# Altium PCB Hat_PCB.PcbDoc (part 1 of 2)
Units mm, origin at the board's own origin, x right, y up, seen from the top; angles counter-clockwise.
Board outline 64 x 85 mm, 4 copper layers (Top Layer, Ground Plane, Power Plane, Bottom Layer), stack 0.844 mm thick; 117 components, 70 nets, 335 pads, 93 vias.
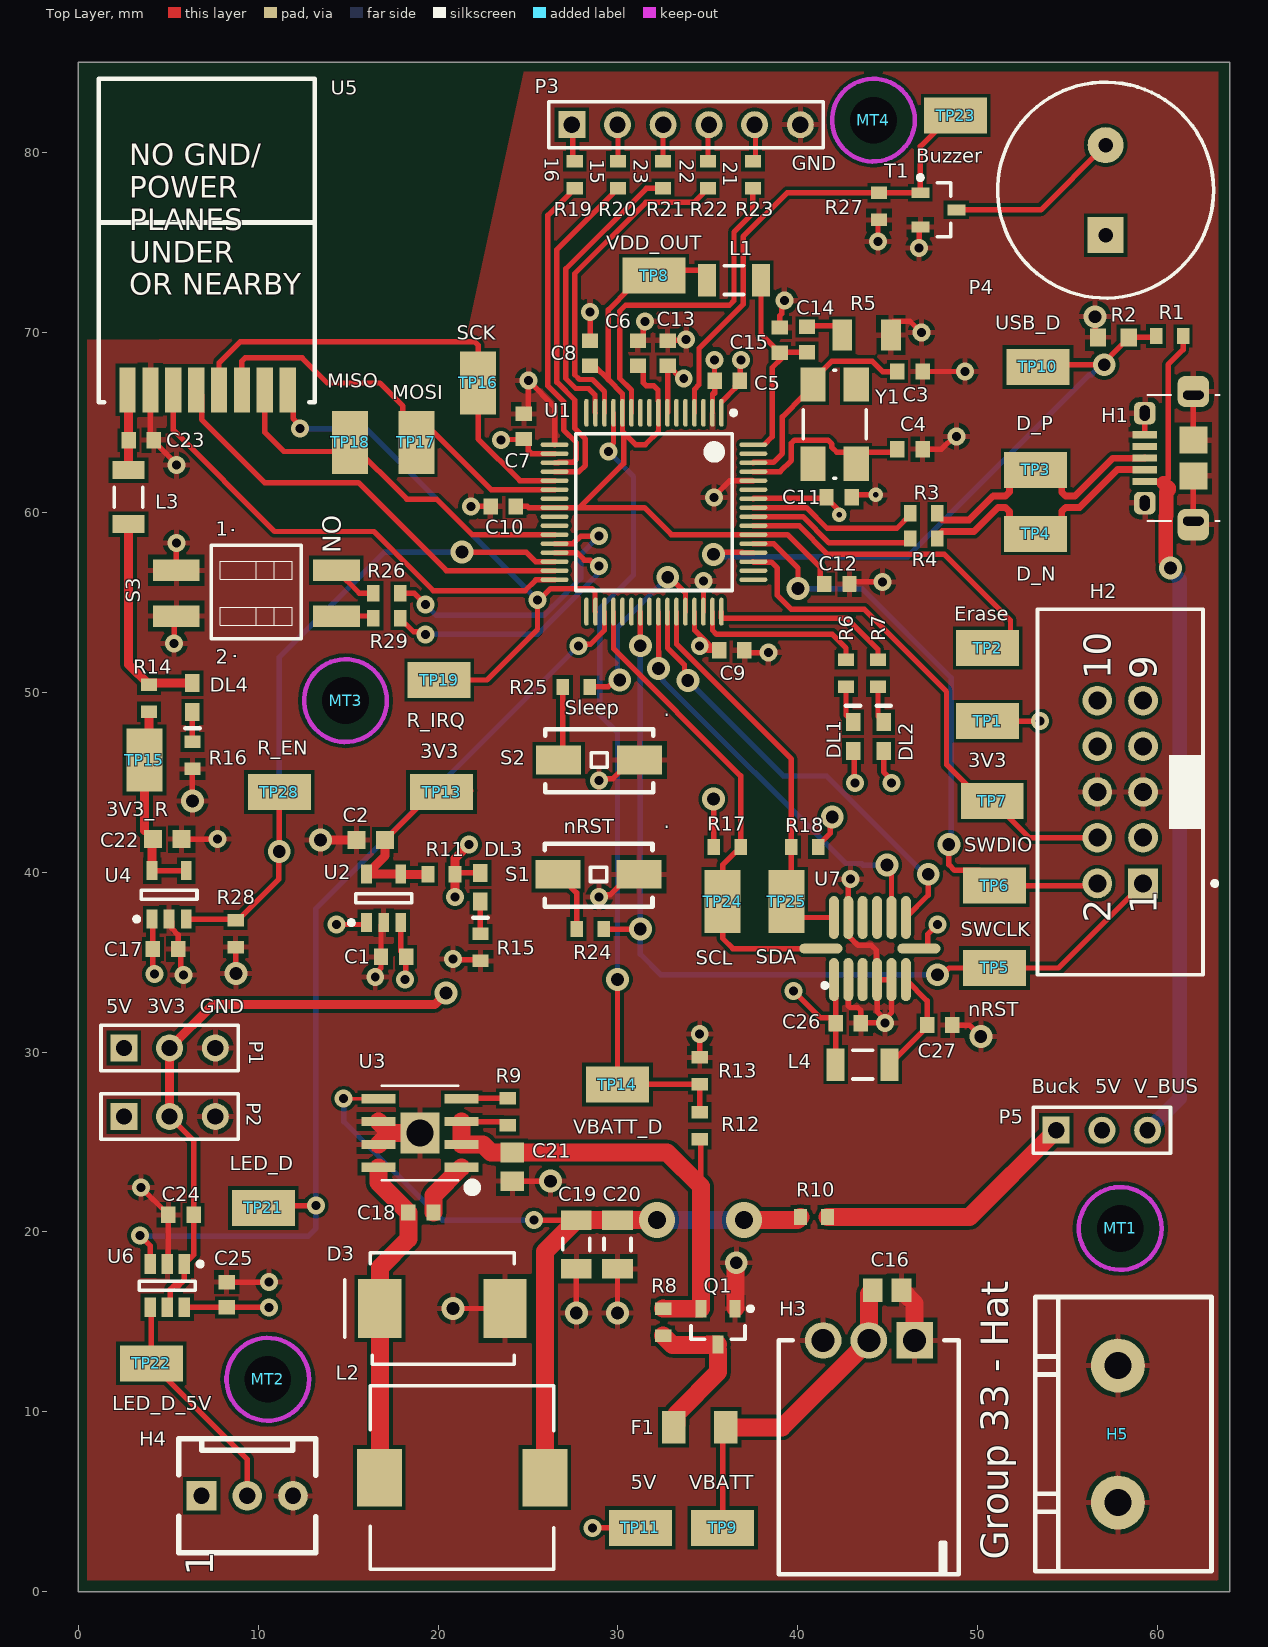
[diagram p0: Top Layer view]
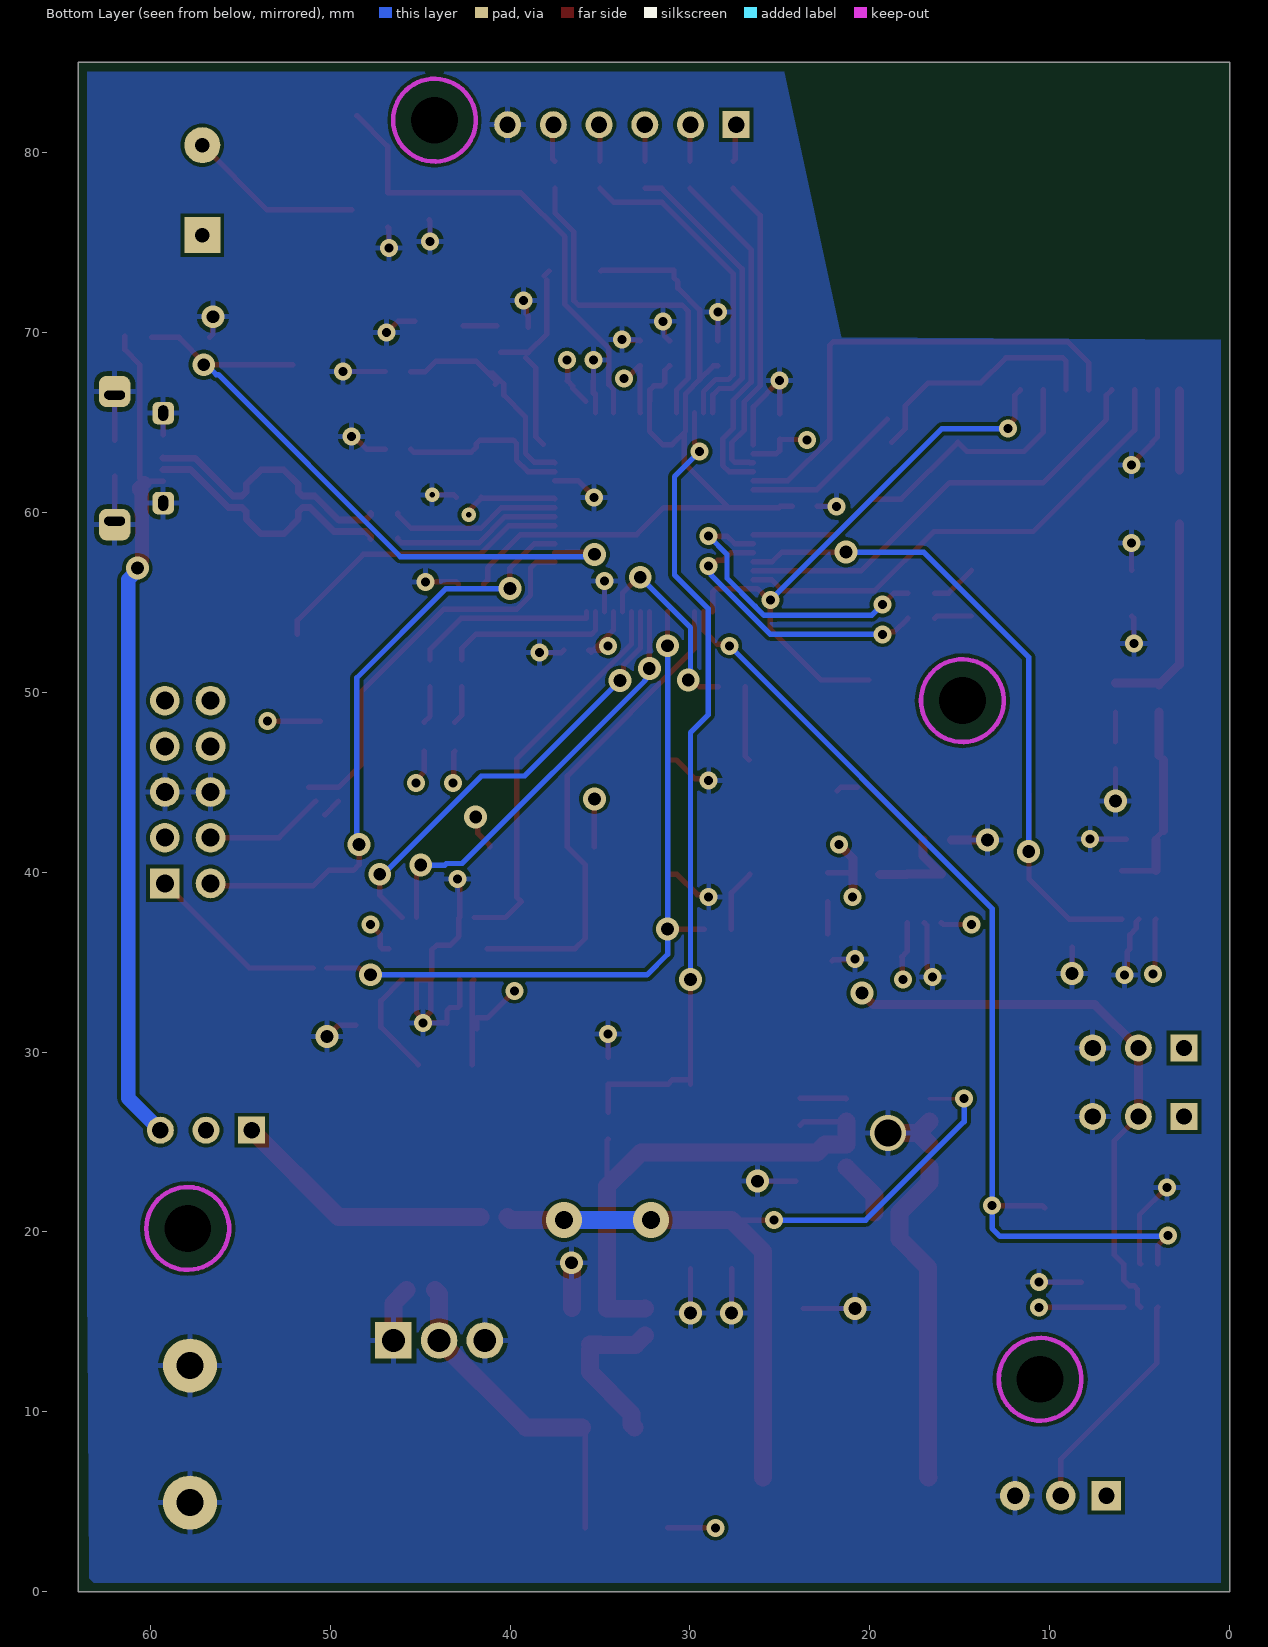
[diagram p1: Bottom Layer view, seen from below]
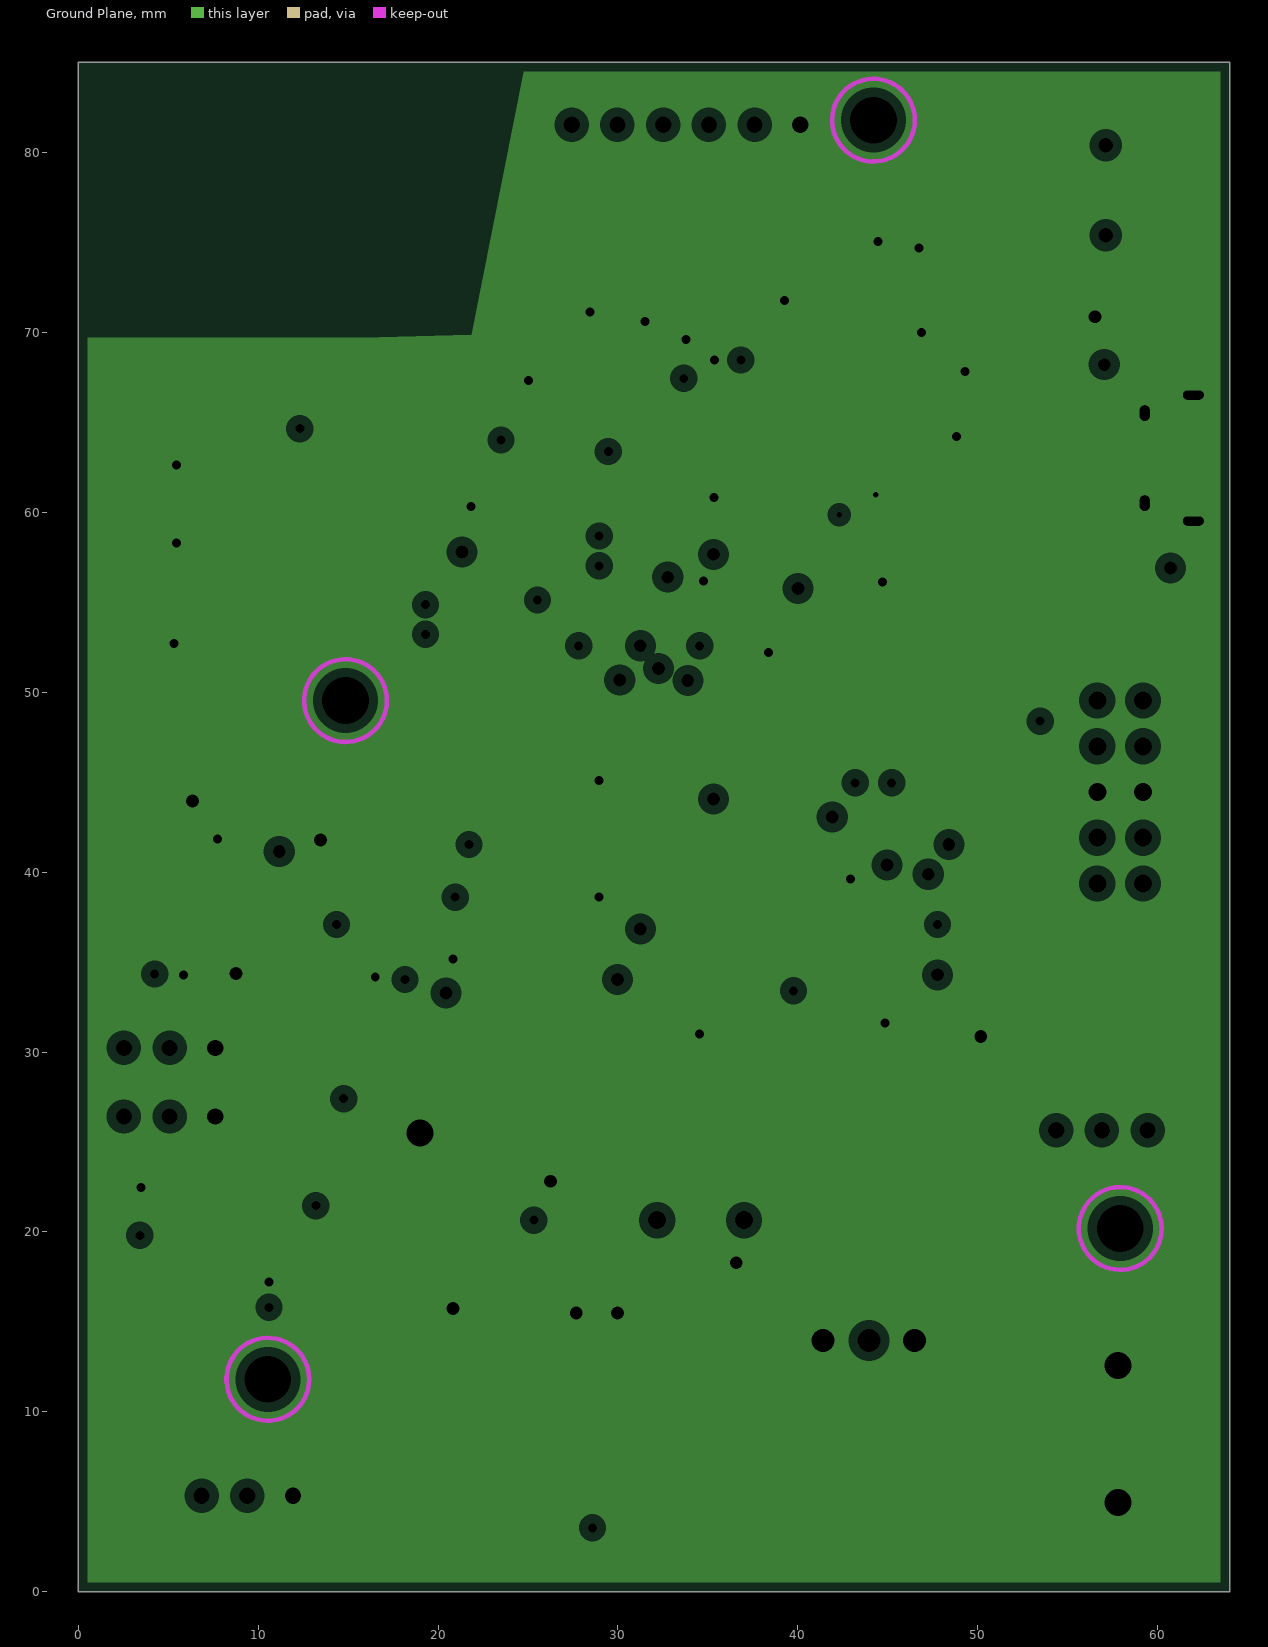
[diagram p2: Ground Plane, clearances drawn from the general rule]
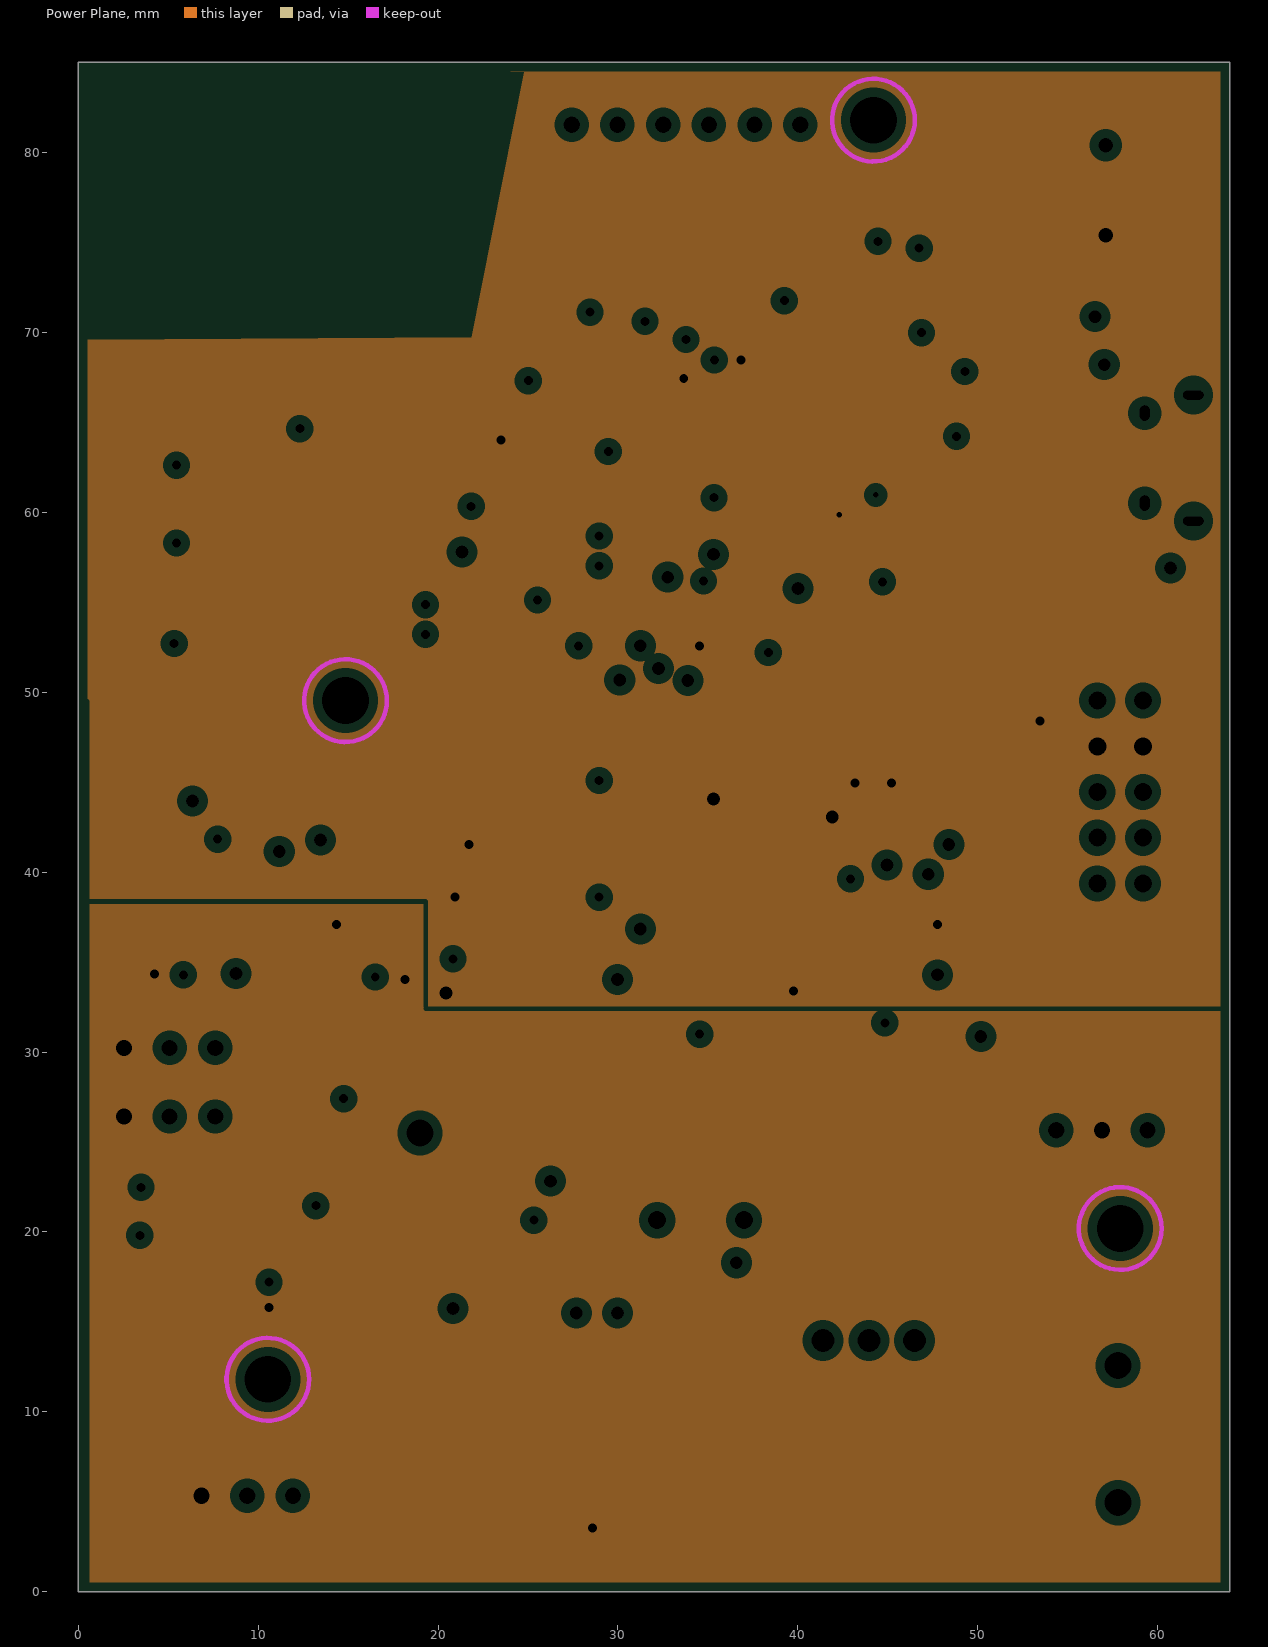
[diagram p3: Power Plane, clearances drawn from the general rule]

## Layer stack, top to bottom
Top Solder: solder mask 0.0102, Solder Resist, Dk 3.5
Top Layer: signal copper 0.0356
Dielectric 1: core 0.32, FR-4, Dk 4.8
Ground Plane: plane copper 0.036, net GND
Dielectric 3: prepreg 0.127, Dk 4.2
Power Plane: plane copper 0.036, net (Multiple Nets)
Dielectric 4: core 0.254, Dk 4.2
Bottom Layer: signal copper 0.0356
Bottom Solder: solder mask 0.0102, Solder Resist, Dk 3.5

## Board outline
0,85 64,85 64,0 0,0 0,85

## Design rules (kind name [scope] priority, off if disabled: settings)
BoardOutlineClearance [All] p1: gap=0.5 ignorepadtopadclearanceinfootprint=FALSE
Clearance GND_POLY [InNamedPolygon('GND')] p1: gap=0.254 ignorepadtopadclearanceinfootprint=FALSE
Clearance Min_Clearance_Circuit_Labs [All] p2: gap=0.2 ignorepadtopadclearanceinfootprint=FALSE
DiffPairsRouting [All] p1: maxlimit=0.254 minlimit=0.254 mostfreqgap=0.254 toplayer_minwidth=0.381 toplayer_maxwidth=0.381 toplayer_prefwidth=0.381 bottomlayer_minwidth=0.381 bottomlayer_maxwidth=0.381 bottomlayer_prefwidth=0.381 maxuncoupledlength=12.7
FanoutControl Fanout_BGA [IsBGA] p1 off: bgadir=Out bgaviamode=Centered fanoutstyle=Auto fanoutdirection=Alternating viagrid=0.025 // Fanout_BGA (Default Rule)
Height [All] p1: minheight=0 maxheight=50.8 prefheight=12.7
HoleSize [All] p1: absolutevalues=TRUE maxlimit=10 minlimit=0.3 maxpercent=80.000 minpercent=20.000
MinimumAnnularRing [All] p1: minimumring=0.1
MinimumSolderMaskSliver [All] p1: minsoldermaskwidth=0.102
NetAntennae [All] p1: netantennaetolerance=1
PlaneClearance [All] p1: clearance=0.508
PlaneConnect [All] p1: planeconnectstyle=Relief reliefexpansion=0.508 reliefentries=4 reliefconductorwidth=0.254 reliefairgap=0.254
PolygonConnect [All] p1: connectstyle=Relief reliefconductorwidth=0.305 reliefentries=4 polygonreliefangle="90 Angle" airgapwidth=0.254
RoutingVias [All] p1: holewidth=0.5 width=1 viastyle="Through Hole" minholewidth=0.3 minwidth=0.8 maxholewidth=1 maxwidth=2
SMDNeckDown [All] p1 off: percent=50.000
SMDToCorner [All] p1: distance=98425
SMDToPlane [All] p1: distance=1968504
SilkToSolderMaskClearance SilkscreenOverComponentPads [IsPad] p1: minsilkscreentomaskgap=0.2 clearancetoexposedcopper=TRUE
SolderMaskExpansion [All] p1: expansion=0.102 istentingtop=FALSE
ViasUnderSMD [All] p1: allowed=FALSE
Width [All] p1: maxlimit=2 minlimit=0.2 preferedwidth=0.3
21 further rules are at their usual default settings.

## Classes and differential pairs
component class Power_Supply: C1 C2 C16 C17 C18 C19 C20 C21 C22 D3 DL3 DL4 F1 H3 L2 P1 P2 P5 Q1 R8 R9 R10 R11 R12 R13 R14 R15 R16 R28 TP9 TP11 TP13 TP14 TP15 TP28 U2 U3 U4
component class Peripherals: C23 C24 C25 C26 C27 H4 L3 L4 P4 R26 R27 R29 S3 T1 TP16 TP17 TP18 TP19 TP21 TP22 TP23 U5 U6 U7
component class MCU: C3 C4 C5 C6 C7 C8 C9 C10 C11 C12 C13 C14 C15 DL1 DL2 H1 H2 H5 L1 MT1 MT2 MT3 MT4 P3 R1 R2 R3 R4 R5 R6 R7 R17 R18 R19 R20 R21 R22 R23 R24 R25 S1 S2 TP1 TP2 TP3 TP4 TP5 TP6 TP7 TP8 TP10 TP24 TP25 U1 Y1
differential pair D: +D_P -D_N

## Components (designator, comment, footprint, x,y, rotation, side; value= is the part's Value field where it differs from the comment)
C1 "1uF" CAPC1608L 17.528,35.292 r180 top
C2 "4.7uF" CAPC1608N 16.256,41.783 r0 top
C3 "27pF" CAPC1608L 46.228,67.818 r180 top
C4 "27pF" CAPC1608L 46.228,63.5 r180 top
C5 "100nF" CAPC1608L 32.766,68.834 r270 top
C6 "100nF" CAPC1608L 31.115,68.834 r90 top
C7 "100nF" CAPC1608L 24.765,64.77 r270 top
C8 "100nF" CAPC1608L 28.448,68.834 r90 top
C9 "100nF" CAPC1608L 36.322,52.324 r180 top
C10 "100nF" CAPC1608L 23.622,60.325 r180 top
C11 "100nF" CAPC1608L 42.291,60.833 r180 top
C12 "100nF" CAPC1608L 42.164,56.007 r0 top
C13 "100nF" CAPC1608L 36.068,67.31 r0 top
C14 "4.7nF" CAPC1608L 40.513,69.596 r270 top
C15 "100nF" CAPC1608L 38.989,69.565 r270 top
C16 "10uF" CAPC2012L 44.958,16.764 r0 top
C17 "1uF" CAPC1608L 4.854,35.732 r0 top
C18 "100nF" CAPC1608L 19.05,21.082 r0 top
C19 "22uF" CAPC3216L 27.686,19.304 r90 top
C20 "22uF" CAPC3216L 29.972,19.304 r90 top
C21 "10uF" CAPC2012L 24.13,23.622 r90 top
C22 "4.7uF" CAPC1608N 4.954,41.832 r180 top
C23 "10uF" CAPC1608L 3.5,64 r180 top
C24 "100nF" CAPC1608L 5.715,20.955 r0 top
C25 "100nF" CAPC1608L 8.255,16.51 r270 top
C26 "100nF" CAPC1608L 42.8,31.6 r180 top
C27 "10uF" CAPC1608L 47.879,31.496 r180 top
D3 "MBRS330T3G 30V 4A" SMC 20.239,15.748 r180 top
DL1 "Blue" WL-SMCW0603 43.068,48.33 r270 top
DL2 "Red" WL-SMCW0603 44.768,48.33 r270 top
DL3 "Green" WL-SMCW0603 22.352,38.354 r90 top
DL4 "Green" WL-SMCW0603 6.35,48.895 r90 top
F1 "2A" RESC3216N 34.544,9.144 r180 top
H1 "JS_USB_MICRO_B" FCI_USB_10118194-0001LF 63.426,63.008 r90 top
H2 "Header 5X2 Vert" IDC2.54-V10D 57.912,44.45 r90 top
H3 "Battery_HEADER_3pin" BATT_HEADER_3POS 43.942,13.97 r180 top
H4 "3 Pin Molex KK Hdr" MOLEX_KK_3_HDR 6.858,5.334 r0 top
H5 "TERM_BLK_2POS" TERM_BLK_2POS 57.785,4.953 r90 top
L1 "1A max, Idc 0.3R," INDC3216L 36.449,72.898 r180 top
L2 "IND 5.2UH 6A" INDUCTOR5u2 21.336,6.35 r0 top
L3 "1A max, Idc 0.3R," INDC3216L 2.794,60.833 r270 top
L4 "1A max, Idc 0.3R," INDC3216L 43.6,29.3 r180 top
MT1 "M2.6 NPTH" MNT-HOLE_2.6mm_NPTH 57.912,20.193 r0 top
MT2 "M2.6 NPTH" MNT-HOLE_2.6mm_NPTH 10.541,11.811 r0 top
MT3 "M2.6 NPTH" MNT-HOLE_2.6mm_NPTH 14.859,49.53 r0 top
MT4 "M2.6 NPTH" MNT-HOLE_2.6mm_NPTH 44.196,81.788 r0 top
P1 "JA_PIN_Header 3" HDR1X3 2.54,30.226 r0 top
P2 "JA_PIN_Header 3" HDR1X3 2.54,26.416 r0 top
P3 "JA_PIN_Header 6" HDR1X6 27.432,81.534 r0 top
P4 "Piezo Buzzer" BUZZER 57.1,75.4 r90 top
P5 "JA_PIN_Header 3" HDR1X3 54.356,25.654 r0 top
Q1 "SSM3J328R,LF" SOT23_L 35.56,14.732 r270 top
R1 "27K" RESC1608L 60.655,69.787 r0 top
R2 "47K" RESC1608N 57.531,69.723 r0 top
R3 "27R" RESC1608L 46.99,59.944 r180 top
R4 "27R" RESC1608L 46.99,58.547 r180 top
R5 "1R" RESC3216L 43.815,69.85 r180 top
R6 "3K" RESC1608L 42.672,51.054 r90 top
R7 "3K3" RESC1608L 44.45,51.054 r90 top
R8 "0R" RESC1608L 32.512,14.986 r90 top
R9 "100K" RESC1608L 23.876,26.67 r90 top
R10 "0R" RESC1608L 40.894,20.828 r0 top
R11 "0R" RESC1608L 20.193,39.878 r0 top
R12 "100K" RESC1608L 34.544,25.908 r270 top
R13 "68K" RESC1608L 34.544,28.956 r270 top
R14 "0R" RESC1608L 3.937,49.657 r90 top
R15 "2K2" RESC1608L 22.352,35.814 r90 top
R16 "2K2" RESC1608L 6.35,46.482 r90 top
R17 "4K7" RESC1608L 36.068,41.402 r180 top
R18 "4K7" RESC1608L 40.386,41.402 r0 top
R19 "2K" RESC1608L 27.6,78.75 r90 top
R20 "2K" RESC1608L 30,78.75 r90 top
R21 "2K" RESC1608L 32.5,78.75 r90 top
R22 "2K" RESC1608L 35,78.75 r90 top
R23 "2K" RESC1608L 37.5,78.75 r90 top
R24 "2K" RESC1608L 28.448,36.83 r0 top
R25 "2K" RESC1608L 27.686,50.292 r0 top
R26 "2K" RESC1608L 17.145,55.499 r0 top
R27 "10K" RESC1608L 44.5,77 r270 top
R28 "10K" RESC1608L 8.754,36.582 r90 top
R29 "2K" RESC1608L 17.145,54.102 r0 top
S1 "nRST" EVQPNF05M 28.92,39.878 r180 top
S2 "Sleep" EVQPNF05M 28.956,46.228 r180 top
S3 "WS_SW DIP-2" DIP_SW_2WAY_SMD 5.451,56.769 r270 top
T1 "BSH105,215" SOT23_L 47.8,76.8 r0 top
TP1 "3V3" TP_1206 50.546,48.387 r0 top value=TP
TP2 "Erase" TP_1206 50.546,52.451 r0 top value=TP
TP3 "D_P" TP_1206 53.213,62.357 r0 top value=TP
TP4 "D_N" TP_1206 53.213,58.801 r0 top value=TP
TP5 "nRST" TP_1206 50.927,34.671 r0 top value=TP
TP6 "SWCLK" TP_1206 50.927,39.243 r0 top value=TP
TP7 "SWDIO" TP_1206 50.8,43.942 r0 top value=TP
TP8 "VDD_OUT" TP_1206 32.004,73.152 r0 top value=TP
TP9 "VBATT" TP_1206 35.814,3.556 r0 top value=TP
TP10 "USB_D" TP_1206 53.34,68.072 r0 top value=TP
TP11 "5V" TP_1206 31.242,3.556 r0 top value=TP
TP13 "3V3" TP_1206 20.193,44.45 r0 top value=TP
TP14 "VBATT_D" TP_1206 29.972,28.194 r180 top value=TP
TP15 "3V3_R" TP_1206 3.683,46.228 r270 top value=TP
TP16 "SCK" TP_1206 22.225,67.183 r90 top value=TP
TP17 "MOSI" TP_1206 18.796,63.881 r90 top value=TP
TP18 "MISO" TP_1206 15.113,63.881 r90 top value=TP
TP19 "R_IRQ" TP_1206 20.066,50.673 r180 top value=TP
TP21 "LED_D" TP_1206 10.287,21.336 r180 top value=TP
TP22 "LED_D_5V" TP_1206 4.064,12.7 r180 top value=TP
TP23 "Buzzer" TP_1206 48.768,82.042 r180 top value=TP
TP24 "SCL" TP_1206 35.814,38.354 r90 top value=TP
TP25 "SDA" TP_1206 39.37,38.354 r90 top value=TP
TP28 "R_EN" TP_1206 11.176,44.45 r180 top value=TP
U1 "ATSAM4S8BA-ANR" LQFP64_L 32,60 r270 top locked
U2 "CAT6219-330TDGT3" SOT95P280X145-5N 16.978,38.542 r90 top
U3 "ADP2302ARDZ-5.0 BUCK" RD_8_1 19,25.5 r180 top locked value=Value
U4 "CAT6219-330TDGT3" SOT95P280X145-5N 5.054,38.732 r90 top
U5 "nRF24 SMD" NRF24 1.143,66.1 r0 top
U6 "SN74LVC1T45" SOT23-6_N 4.953,17.018 r270 top
U7 "ADXL345BCCZ" ADI-CC-14-1_V 44,35.75 r90 top locked
Y1 "12MHz" 6.0X3.5-4 42.037,64.897 r90 top

## Footprints (in the part's own frame and the unit in brackets; to place one, negate y for a bottom-side part, rotate by r counter-clockwise, add the part's x,y. Pads: shape width x height; smd on the part's side, far side on the other; paste and mask are expansions set on the pad)
6.0X3.5-4 [mm] "4 SMD 6.0X3.5 mm No Lead Crystal"
  rect 1.9x1.4 smd: 1(-2.2,-1.2) 2(2.2,-1.2) 3(2.2,1.2) 4(-2.2,1.2)
  silkscreen extent -3,-1.75 3,1.75, body extent -3,-1.75 3,1.75, height 1.2
ADI-CC-14-1_V [mm]
  oval 2.4x0.55 smd: 1(-1.725,2) 2(-1.725,1.2) 3(-1.725,0.4) 4(-1.725,-0.4) 5(-1.725,-1.2) 6(-1.725,-2) 8(1.725,-2) 9(1.725,-1.2) 10(1.725,-0.4) 11(1.725,0.4) 12(1.725,1.2) 13(1.725,2)
  oval 0.55x2.4 smd: 7(0,-2.725) 14(0,2.725)
  silkscreen extent -2.18,2.37 -1.93,2.62, body extent -1.5,-2.5 1.5,2.5, height 1
BATT_HEADER_3POS [mil]
  rect 80x80 hole 50: 1(-100,0)
  round 80 hole 50: 2(0,0) 3(100,0)
  silkscreen extent -197,0 197,512, body extent -197,-31 200,504, height 294
BUZZER [mm]
  rect 2x2 hole 0.8: 1(0,0)
  round 2 hole 0.8: 2(5,0)
  silkscreen extent -3.5,-6 8.5,6, body extent -3.58,-6.08 8.58,6.08, height 6.5
CAPC1608L [mm] "Chip Capacitor, Body 1.6x0.8mm, IPC High Density"
  rect 0.8x0.9 smd: 1(-0.7,0) 2(0.7,0)
  body extent -0.87,-0.48 0.87,0.48, height 0.85
CAPC1608N [mm] "Chip Capacitor, Body 1.6x0.8mm, IPC Medium Density"
  rect 1x1 smd: 1(-0.8,0) 2(0.8,0)
  body extent -0.87,-0.48 0.87,0.48, height 0.85
CAPC2012L [mm] "Chip Capacitor, Body 2.0x1.3mm, IPC High Density"
  rect 1.1x1.3 smd: 1(-0.8,0) 2(0.8,0)
  body extent -1.1,-0.72 1.1,0.72, height 1.1
CAPC3216L [mm] "Chip Capacitor, Body 3.2x1.6mm, IPC High Density"
  rect 1.1x1.7 smd: 1(-1.35,0) 2(1.35,0)
  silkscreen extent -0.35,-0.75 0.35,0.75, body extent -1.7,-0.9 1.7,0.9, height 1.35
DIP_SW_2WAY_SMD [mm] "DIP Switch; 4 Leads"
  rect 1.2x2.6 smd: 1(0,0) 2(2.54,0) 3(2.54,8.9) 4(0,8.9)
  silkscreen extent -1.4,1.95 3.81,6.95
EVQPNF05M [mm] "Panansonic light touch SMD push button switch"
  rect 2.5x1.6 smd: 1(-2.25,0) 2(2.25,0)
  silkscreen extent -3,-1.7 3,1.8, body extent -3,-1.7 3,1.8, height 5
FCI_USB_10118194-0001LF [mm] "Micro USB B Type Receptacle"
  rect 0.4x1.35 smd mask+0.07: 1(-1.3,4.15) 2(-0.65,4.15) 3(0,4.15) 4(0.65,4.15) 5(1.3,4.15)
  rrect50% 1.75x1.75 hole 0.5 slot 1.15 at 90 deg copper offset -0.2,0 paste-2539.97 mask+0.1: 6(-3.5,1.45)
  rrect50% 1.25x1.2 hole 0.55 slot 0.85 at 0 deg: 6(-2.5,4.15) 6(2.5,4.15)
  rect 1.5x1.55 smd: 6(-1,1.45) 6(1,1.45)
  rrect50% 1.75x1.75 hole 0.5 slot 1.15 at 90 deg copper offset 0.2,0 paste-2539.97 mask+0.1: 6(3.5,1.45)
  silkscreen extent -3.5,0 3.5,4
HDR1X3 [mm] "Connector; Header; 3 Position"
  rect 1.5x1.5 hole 0.9: 1(0,0)
  round 1.5 hole 0.9: 2(2.54,0) 3(5.08,0)
  silkscreen extent -1.27,-1.27 6.35,1.27, body extent -1.27,-1.27 6.35,1.27, height 8.89
HDR1X6 [mm] "Connector; Header; 6 Position"
  rect 1.5x1.5 hole 0.9: 1(0,0)
  round 1.5 hole 0.9: 2(2.54,0) 3(5.08,0) 4(7.62,0) 5(10.16,0) 6(12.7,0)
  silkscreen extent -1.27,-1.27 13.97,1.27, body extent -1.27,-1.27 13.97,1.27, height 8.89
IDC2.54-V10D [mm] "Connector; IDC, Low Profile Male Header, Thru-Hole; 10 Position; Vertical; Pitch 2.54 mm; Body 20.32 x 9.2 x 9.45 mm (LxWxH)"
  rect 1.65x1.65 hole 1: 1(-5.08,-1.27)
  round 1.65 hole 1: 2(-5.08,1.27) 3(-2.54,-1.27) 4(-2.54,1.27) 5(0,-1.27) 6(0,1.27) 7(2.54,-1.27) 8(2.54,1.27) 9(5.08,-1.27) 10(5.08,1.27)
  silkscreen extent -10.16,-5.38 10.16,4.6, body extent -10.16,-4.6 10.16,4.6, height 9.45
INDC3216L [mm] "Chip Inductor, Body 3.2x1.6mm, IPC High Density"
  rect 1x1.8 smd: 1(-1.5,0) 2(1.5,0)
  silkscreen extent -0.55,-0.8 0.55,0.8, body extent -1.75,-0.95 1.75,0.95, height 1.9
INDUCTOR5u2 [mm]
  rect 2.5x3.2 smd: 1(-4.6,0) 2(4.6,0)
  silkscreen extent -5.1,-5.1 5.1,5.1, body extent -5,-5 5,5, height 3.8
LQFP64_L [mm] "Thin QFP, 64-Leads, Body 10x10mm, Pitch 0.5mm, IPC High Density"
  oval 1.55x0.25 smd mask+0.07: 1(-5.525,3.75) 2(-5.525,3.25) 3(-5.525,2.75) 4(-5.525,2.25) 5(-5.525,1.75) 6(-5.525,1.25) 7(-5.525,0.75) 8(-5.525,0.25) 9(-5.525,-0.25) 10(-5.525,-0.75) 11(-5.525,-1.25) 12(-5.525,-1.75) 13(-5.525,-2.25) 14(-5.525,-2.75) 15(-5.525,-3.25) 16(-5.525,-3.75) 33(5.525,-3.75) 34(5.525,-3.25) 35(5.525,-2.75) 36(5.525,-2.25) 37(5.525,-1.75) 38(5.525,-1.25) 39(5.525,-0.75) 40(5.525,-0.25) 41(5.525,0.25) 42(5.525,0.75) 43(5.525,1.25) 44(5.525,1.75) 45(5.525,2.25) 46(5.525,2.75) 47(5.525,3.25) 48(5.525,3.75)
  oval 0.25x1.55 smd mask+0.07: 17(-3.75,-5.525) 18(-3.25,-5.525) 19(-2.75,-5.525) 20(-2.25,-5.525) 21(-1.75,-5.525) 22(-1.25,-5.525) 23(-0.75,-5.525) 24(-0.25,-5.525) 25(0.25,-5.525) 26(0.75,-5.525) 27(1.25,-5.525) 28(1.75,-5.525) 29(2.25,-5.525) 30(2.75,-5.525) 31(3.25,-5.525) 32(3.75,-5.525) 49(3.75,5.525) 50(3.25,5.525) 51(2.75,5.525) 52(2.25,5.525) 53(1.75,5.525) 54(1.25,5.525) 55(0.75,5.525) 56(0.25,5.525) 57(-0.25,5.525) 58(-0.75,5.525) 59(-1.25,5.525) 60(-1.75,5.525) 61(-2.25,5.525) 62(-2.75,5.525) 63(-3.25,5.525) 64(-3.75,5.525)
  silkscreen extent -5.65,-4.35 4.35,4.55, body extent -5,-5 5,5, height 1.6
MNT-HOLE_2.6mm_NPTH [mm] "Mounting Hole 2.6mm non plated"
  round 0 hole 2.6 unplated: 1(0,0)
  Keep-Out Layer circle w0.254: c0,0 r2.3
MOLEX_KK_3_HDR [mil] "MOLEX_KK_3_HDR"
  rect 65x65 hole 35.43: 1(0,0)
  round 65 hole 35.43: 2(100,0) 3(200,0)
  silkscreen extent -50,-125 250,125, body extent -50,-114 250,114, height 461
NRF24 [mm]
  rect 0.9x2.5 smd: 1(1.6,0.7) 2(2.871,0.7) 3(4.143,0.7) 4(5.414,0.7) 5(6.686,0.7) 6(7.957,0.7) 7(9.229,0.7) 8(10.5,0.7)
  silkscreen extent 0,0 12,18, body extent 0,0 12,18, height 2.27
RD_8_1 [mil]
  rect 74x20 smd paste+0 mask+0: 1(-91,75) 2(-91,25) 3(-91,-25) 4(-91,-75) 5(91,-75) 6(91,-25) 7(91,25) 8(91,75)
  rect 84.65x90 smd paste-44.5 mask+0: EPAD(0,0)
  silkscreen extent -118,-104 84,123, body extent 0,0 10,10, height 10
RESC1608L [mm] "Chip Resistor, Body 1.6x0.8mm, IPC High Density"
  rect 0.7x0.9 smd: 1(-0.75,0) 2(0.75,0)
  body extent -0.85,-0.48 0.85,0.48, height 0.9
RESC1608N [mm] "Chip Resistor, Body 1.6x0.8mm, IPC Medium Density"
  rect 0.9x1 smd: 1(-0.85,0) 2(0.85,0)
  body extent -0.85,-0.48 0.85,0.48, height 0.6
RESC3216L [mm] "Chip Resistor, Body 3.1x1.6mm, IPC High Density"
  rect 1.1x1.7 smd: 1(-1.35,0) 2(1.35,0)
  body extent -1.68,-0.87 1.68,0.87, height 2.54
RESC3216N [mm] "Chip Resistor, Body 3.2x1.6mm, IPC Medium Density"
  rect 1.3x1.8 smd: 1(-1.45,0) 2(1.45,0)
  body extent -1.68,-0.87 1.68,0.87, height 0.71
SMC [mm] "DO-214-AB/SMC; 2 C-Bend Leads; Body 7.9 x 5.9 mm, inc. leads (LxW)"
  rect 2.4x3.3 smd: 1(-3.475,0) 2(3.475,0)
  silkscreen extent -4,-3.1 5.43,3.1, body extent -4.22,-2.95 3.72,2.95, height 2.27
SOT23-6_N [mm]
  rect 1.1x0.65 smd: 1(-1.2,0.95) 2(-1.2,0) 3(-1.2,-0.95) 4(1.2,-0.95) 5(1.2,0) 6(1.2,0.95)
  silkscreen extent -1.32,-1.55 0.25,1.95, body extent -0.9,-1.55 0.9,1.55, height 1.45
SOT23_L [mm] "SOT23, 3-Leads, Body 2.9x1.3mm, Pitch 0.95mm, Lead Span 2.3mm, IPC High Density"
  rect 1x0.6 smd: 1(-1,0.95) 2(-1,-0.95) 3(1,0)
  silkscreen extent -1.12,-1.5 0.7,1.93, body extent -0.7,-1.5 0.7,1.5, height 1.1
SOT95P280X145-5N [mm] "SOT23, 5-Leads, Body 2.90x2.80mm, Pitch 0.95mm, IPC Medium Density"
  rect 1.05x0.6 smd: 1(-1.35,0.95) 2(-1.35,0) 3(-1.35,-0.95) 4(1.35,-0.95) 5(1.35,0.95)
  silkscreen extent -1.47,-1.55 0.25,1.92, body extent -0.87,-1.52 0.87,1.53, height 1.45
TERM_BLK_2POS [mm]
  round 3 hole 1.5: 1(0,0) 2(7.62,0)
  silkscreen extent -3.81,-5.2 11.43,4.6
TP_1206 [mm] "Test Point Pad"
  rect 3.5x2 smd: 1(0,0)
  body extent -1.62,-0.85 1.63,0.8, height 2
WL-SMCW0603 [mm] "2.4 x 0.8 x 0.7mm LED"
  rect 1x0.8 smd: 1(0,0) 2(1.6,0)
  silkscreen extent -0.9,-0.4 -0.9,0.4

## Part data
C1 C17: library part CC_1uF_0603, "CAP CER 1uF Y5V -20% +80% 16V 0603", Max Voltage=16V, Code_IPC="1608 [0603]", PackageReference=0603, Storage Location="PCB Assembly WS", Supplier="ECE Dept"
C2 C22: library part CC_4.7uF_0603, "CAP CER 4.7uF X5R +-20%  10V 0603", Max Voltage=10V, Code_IPC=2012[0805], Note="Footprint corresponds to dimensions for bulk cassette packaging. This case size has tightened tolerances.", PackageReference=0805, Storage Location="PCB Assembly WS", Supplier="ECE Dept"
C3 C4: library part CC_27pF_0603, "CAP CER 27pF NPO/COG +-5% 50V 0603", Code_IPC="1608 [0603]", PackageReference=0603, Storage Location="PCB Assembly WS", Supplier="ECE Dept"
C5 C6 C7 C8 C9 C10 C11 C12 C13 C15 C18 C24 C25 C26: library part CC_100nF_0603, "CAP CER 100nF X7R +-10% 50V 0603", Code_IPC="1608 [0603]", PackageReference=0603, Storage Location="PCB Assembly WS", Supplier="ECE Dept"
C14: library part CC_4.7nF_0603, "CAP CER 4.7nF X7R +-10% 50V 0603", Code_IPC="1608 [0603]", PackageReference=0603, Storage Location="PCB Assembly WS", Supplier="ECE Dept"
C16 C21: library part CC_10uF_0805_16V, "CAP CER 10uF X5R 16V 0805", Manufacturer="Samsung Electro-Mechanics", Manufacturer Part Number=CL21A106KOQNNWE, Max Voltage=16V, Operating Temperature="-55°C ~ 85°C", Package / Case="0805 (2012 Metric)", Ratings=-, Supplier Part Number 1=1276-2894-1-ND, Temperature Coefficient=X5R, Tolerance=±10%, Applications="General Purpose", Category=Capacitors, Code_IPC=2012[0805], ComponentLink1Description=http://www.samsungsem.com/kr/support/product-search/mlcc/CL21A106KOQNNWE.jsp, ComponentLink1URL=http://www.samsungsem.com/kr/support/product-search/mlcc/CL21A106KOQNNWE.jsp, Features=-, Height - Seated (Max)=-, Lead Spacing=-, Lead Style=-, Mounting Type="Surface Mount, MLCC", Note="Footprint corresponds to dimensions for bulk cassette packaging. This case size has tightened tolerances.", Notification="Current market demand for these product types have resulted in fluctuating and extending lead times. Lead times may differ.", PackageReference=0805, Packaging="Cut Tape (CT)", Part Status=Active, Pricing 1="1=0.35, 10=0.25, 100=0.1178, 500=0.08254, 1000=0.06831 (NZD)", RoHS="RoHS Compliant", Size / Dimension="0.079\" L x 0.049\" W (2.00mm x 1.25mm)", Stock 1=20000, Supplier 1=Digi-Key, Thickness (Max)="0.055\" (1.40mm)", Voltage - Rated=16V
C19 C20: library part CC_22uF_1206, "CAP CER 22uF Y5V -20% +80% 10V 1206", Dielectric=Y5V, Max Voltage=10V, Storage Location="PCB Assembly WS", Supplier="ECE Dept"
C23 C27: library part CC_10uF_0603, "CAP CER 10UF X5R +-20% 6V3 0603", Voltage - Rated=6.3V, Storage Location="PCB Assembly WS", Supplier="ECE Dept"
D3: library part MBRS330T3G, "SCHOTTKY  30V 4A", Base Part Number=MBRS330, Capacitance @ Vr, F=-, Current - Average Rectified (Io)=4A, Manufacturer="ON Semiconductor", Operating Temperature - Junction="-65°C ~ 150°C", Package / Case="DO-214AB, SMC", Supplier Device Package=SMC, Supplier Part Number 1=MBRS330T3GOSCT-ND, Category="Discrete Semiconductor Products", ComponentLink1Description=http://www.onsemi.com/pub/Collateral/MBRS340T3-D.PDF, ComponentLink1URL=http://www.onsemi.com/pub/Collateral/MBRS340T3-D.PDF, Diode Type=Schottky, Manufacturer Part Number=MBRS330T3G, Mounting Type="Surface Mount", Packaging="Cut Tape (CT)", Part Status=Active, Pricing 1="1=0.93, 10=0.79, 100=0.5902, 500=0.46368, 1000=0.35829 (NZD)", RoHS="RoHS Compliant", Speed="Fast Recovery =< 500ns, > 200mA (Io)", Stock 1=8919, Supplier 1=Digi-Key
DL1: library part DL_150060BS75000, "LED Blue 270mcd 0603 SMD", Forward Current If=30, Forward Voltage=3.2, Manufacturer="WURTH ELEKTRONIK", Manufacturer Part Number=150060BS75000, Supplier Part Number 1=2322069, LED Colour=Blue, Luminous Intensity=270, Pricing="1=0.3844, 50=0.3252, 100=0.2957, 500=0.2365 (NZD)", Storage Location="PCB Assembly WS", Supplier="ECE Dept", Supplier 1=Farnell, Viewing Angle=120°, Wavelength Typ=470
DL2: library part DL_150060RS75000, "LED Red 250mcd 0603 SMD", Forward Current If=30, Forward Voltage=2, Manufacturer="WURTH ELEKTRONIK", Manufacturer Part Number=150060RS75000, Supplier Part Number 1=2322071, LED Colour=Red, LED Mounting=SMD, Lens Shape=Rectangular, Luminous Intensity=250, Storage Location="PCB Assembly WS", Supplier="ECE Dept", Supplier 1=Farnell, Viewing Angle=140°, Wavelength Typ=625
DL3 DL4: library part DL_150060GS75000, "LED Green 430mcd 0603 SMD", Forward Current If=30, Forward Voltage=3.2, Manufacturer="WURTH ELEKTRONIK", Manufacturer Part Number=150060GS75000, Supplier Part Number 1=2322070, LED Colour=Green, LED Mounting=SMD, Lens Shape=Rectangular, Luminous Intensity=430, Storage Location="PCB Assembly WS", Supplier="ECE Dept", Supplier 1=Farnell, Viewing Angle=140°, Wavelength Typ=520
F1: library part FS_Fuse_2.0A, "Fuse 2.0A Very Fast Acting 1206 SMD", Manufacturer=MULTICOMP, Manufacturer Part Number="MC12CF 002", Supplier Part Number 1=1841029, Manufacturer PN="MC12CF 002", Storage Location="PCB Assembly WS", Supplier="ECE Dept", Supplier 1=Farnell
H1: library part JS_USB_MICRO_B_SMT, "CONN USB MICRO B RECPT SMT R/A", Manufacturer=FCI, Manufacturer Part Number=10118194-0001LF, Supplier Part Number 1=609-4618-1-ND, Features="Shielded, Solder Retention", Gender=Receptacle, Mounting Type="Surface Mount, Right Angle, Horizontal", Number of Contacts=5, Specifications="USB 2.0", Supplier 1=Digi-Key
H2: library part JA_HDR_IDC_5X2_VERT, "IDC Header, 2,54mm, 10-Pin, Vert", Supplier Part Number 1=1096985, Storage Location="ECE Dept Store", Supplier="ECE Dept", Supplier 1=Farnell
H3: "3Pin Header 2.54mm spacing / Digikey #WM22663-ND", Supplier Part Number 1=WM22663-ND, Supplier 1=Digi-Key
H4: library part LED_Strip_Header, "CONN HEADER 3POS 2.54mm VERT_Thru Hole", Manufacturer=Molex, Manufacturer PN=22-23-2031, Supplier Part Number 1=9731156, Storage Location="ECE Dept Store", Supplier="ECE Dept", Supplier 1=Farnell
H5: "2 Position Terminal Block 7.62mm spacing"
L1 L3 L4: library part IN_Ferrite-Bead, "Ferrite Bead, Rdc 0.3R, Z100MHZ 600R, Imax 1A, SMD 1206", DC Current Rating=1, DC Resistance Max=0.08, Ferrite Case Style="1206 ^3216 Metric]", Frequency Range="50MHz to 1", Impedance Tolerance="± 25%", Manufacturer=FAIR-RITE, Manufacturer Part Number=2512066017Y1, Supplier Part Number 1=1612060, Ferrite Mounting=SMD, Impedance=600, Manufacturer PN=2512066017Y1, Storage Location="PCB Assembly WS", Supplier="ECE Dept", Supplier 1=Farnell
L2: library part CDRH104RNP-5R2NC, "FIXED IND 5.2UH 6A 22 MOHM SMD", Current - Saturation=5.6A, DC Resistance (DCR)="22 mOhm Max", Frequency - Self Resonant=-, Manufacturer="Sumida America Components Inc.", Operating Temperature="-40°C ~ 100°C", Package / Case=Nonstandard, Supplier Part Number 1=308-2280-1-ND, Tolerance=±30%, Category="Inductors, Coils, Chokes", ComponentLink1Description=http://products.sumida.com/products/pdf/CDRH104R.pdf, ComponentLink1URL=http://products.sumida.com/products/pdf/CDRH104R.pdf, Height - Seated (Max)="0.157\" (4.00mm)", Manufacturer Part Number=CDRH104RNP-5R2NC, Material - Core=Ferrite, Mounting Type="Surface Mount", Packaging="Cut Tape (CT)", Part Status=Active, Pricing 1="1=2.9, 10=2.678, 100=1.8743, 500=1.5173 (NZD)", Q @ Freq=-, Ratings=-, RoHS="RoHS Compliant", Shielding=Shielded, Size / Dimension="0.402\" L x 0.394\" W (10.20mm x 10.00mm)", Stock 1=3849, Supplier 1=Digi-Key, Supplier Device Package=-, Type=-
MT1 MT2 MT3 MT4: library part MC_M2.6_HOLE, "Fixing M2.6 Mount Hole NPTH", Manufacturer=Hi-Q, Manufacturer PN="2BV series M2.5 Clearance", Price=0, Supplier="ECE Dept"
P1 P2 P5: "Header, 3-Pin", LatestRevisionDate=17-Jul-2002, LatestRevisionNote="Re-released for DXP Platform.", Publisher="Altium Limited"
P3: "Header, 6-Pin", LatestRevisionDate=17-Jul-2002, LatestRevisionNote="Re-released for DXP Platform.", Publisher="Altium Limited"
P4: "TDK - PS1240P02BT - BUZZER, PIEZO, 70DB, 12.2MM", Frequency=4kHz, Manufacturer 1=TDK, Manufacturer Part Number 1=PS1240P02BT, Max Operating Temperature=70°C, Min Operating Temperature=-10°C, Operating Supply Voltage=3V, Package Quantity=1, Supplier Part Number 1=445-2525-1-ND, ComponentLink1Description=https://datasheet.ciiva.com/0/ef532-ps-112.pdf?src-supplier=Digi-Key, ComponentLink1URL=https://datasheet.ciiva.com/0/ef532-ps-112.pdf?src-supplier=Digi-Key, ComponentLink2Description=https://datasheet.ciiva.com/0/ef532-ps-111.pdf?src-supplier=Digi-Key, ComponentLink2URL=https://datasheet.ciiva.com/0/ef532-ps-111.pdf?src-supplier=Digi-Key, ComponentLink3Description=https://datasheet.ciiva.com/3306/ef532-ps-3306958.pdf?src-supplier=Avnet, ComponentLink3URL=https://datasheet.ciiva.com/3306/ef532-ps-3306958.pdf?src-supplier=Avnet, ComponentLink4Description=https://datasheet.ciiva.com/16225/ef532-ps-16225062.pdf?src-supplier=Onlinecomponents.com, ComponentLink4URL=https://datasheet.ciiva.com/16225/ef532-ps-16225062.pdf?src-supplier=Onlinecomponents.com, Diameter=12.2mm, Height=6.5mm, Lead Free="Lead Free", Mount="Through Hole", Number of Pins=2, Number of Terminals/Pins=2, Packaging="Tape and Reel", Pricing 1="1=0.61000, 10=0.52500, 25=0.49120, 50=0.46580, 100=0.44110 (USD)", RoHS=Yes, RoHS Compliant=Yes, Series=PS, Stock 1=24025, Supplier 1=Digi-Key, Termination="PC Pins", Voltage Rating (DC)=3V, Washable=No
Q1: library part TM_SSM3J328R, "MOSFET P-CH 20V 6A SOT23-3", Case/Package=SOT-23-3, Continuous Drain Current (ID)=6A, Drain to Source Breakdown Voltage=-20V, Drain to Source Resistance=47.4mR, Drain to Source Voltage (Vdss)=20V, Gate to Source Voltage (Vgs)=8V, Input Capacitance=840pF, Input Capacitance (Ciss) @ Vds="840pF @ 10V", Manufacturer=Toshiba, Max Operating Temperature=150°C, Max Power Dissipation=1W, Min Operating Temperature=-55°C, Package / Case="SOT-23-3 Flat Leads", Package Quantity=3000, Power Dissipation=2W, Supplier Device Package=SOT-23F, Supplier Part Number=SSM3J328RLFDKR-ND, ComponentLink1Description=https://datasheet.ciiva.com/11158/ssm3j328r-datasheet-en-20140301-11158652.pdf, ComponentLink1URL=https://datasheet.ciiva.com/11158/ssm3j328r-datasheet-en-20140301-11158652.pdf, Current - Continuous Drain (Id) @ 25° C=6A, Element Configuration=Single, FET Feature="Logic Level Gate, 1.5V Drive", FET Type="MOSFET P-Channel, Metal Oxide", Gate Charge (Qg) @ Vgs="12.8nC @ 4.5V", Manufacturer Part Number=SSM3J328R,LF, Mount="Surface Mount", Number of Channels=1, Number of Elements=1, Number of Pins=3, Packaging="Tape and Reel", Power - Max=1W, Pricing="1=0.79, 10=0.658, 25=0.5772, 100=0.4939, 250=0.42836, 500=0.36284, 1000=0.27972 (NZD)", Radiation Hardening=No, Rds On Max=29.8mR, Storage Location="PCB Assembly WS", Supplier=Digi-Key, Supplier 1=Digi-Key, Supplier Part Number 1=SSM3J328RLFDKR-ND, Turn-Off Delay Time=107ns, Turn-On Delay Time=32ns, Vgs(th) (Max) @ Id="1V @ 1mA"
R1: library part RS_27K, "RES 27K OHM 1/10W 5% 0603 SMD", Storage Location="PCB Assembly WS", Supplier="ECE Dept"
R2: library part RS_47K, "RES 47.0K OHM 1/10W 5% 0603 SMD", Storage Location="PCB Assembly WS", Supplier="ECE Dept"
R3 R4: library part RS_27R, "RES 27 OHM 1/10W 5% 0603 SMD", Storage Location="PCB Assembly WS", Supplier="ECE Dept"
R5: library part RT_1R, "RES 1R OHM 1/4W 5% 1206 SMD", Storage Location="PCB Assembly WS", Supplier="ECE Dept"
R6: library part RS_3K, "RES 3K OHM 1/10W 5% 0603 SMD", Storage Location="PCB Assembly WS", Supplier="ECE Dept"
R7: library part RS_1K5, "RES 1.5K OHM 1/10W 5% 0603 SMD", Storage Location="PCB Assembly WS", Supplier="ECE Dept"
R8 R10 R11 R14: library part RS_0R0, "RES 0.0 OHM 1/10W 5% 0603 SMD", Storage Location="PCB Assembly WS", Supplier="ECE Dept"
R9 R12: library part RS_100K, "RES 100K OHM 1/10W 5% 0603 SMD", Storage Location="PCB Assembly WS", Supplier="ECE Dept"
R13: library part RS_68K, "RES 68.0K OHM 1/10W 5% 0603 SMD", Storage Location="PCB Assembly WS", Supplier="ECE Dept"
R15 R16: library part RS_2K2, "RES 2.2K OHM 1/10W 5% 0603 SMD", Storage Location="PCB Assembly WS", Supplier="ECE Dept"
R17 R18: library part RS_4K7, "RES 4.7K OHM 1/10W 5% 0603 SMD", Storage Location="PCB Assembly WS", Supplier="ECE Dept"
R19 R20 R21 R22 R23 R24 R25 R26 R29: library part RS_2K, "RES 2K OHM 1/10W 5% 0603 SMD", Storage Location="PCB Assembly WS", Supplier="ECE Dept"
R27 R28: library part RS_10K, "RES 10.0K OHM 1/10W 5% 0603 SMD", Storage Location="PCB Assembly WS", Supplier="ECE Dept"
S1 S2: library part WS_EVQPNF05M, "Panasonic 6 x 3.5mm SMD Light Touch Switch Type SMD", Manufacturer=Panasonic, Manufacturer PN=EVQPNF05M, Supplier Part Number 1=2079481, PackageDescription="6.0 x 3.5 mm", Storage Location="PCB Assembly WS", Supplier="ECE Dept", Supplier 1=Farnell, Supplier 2=Digi-Key, Supplier Part Number 2=P13598SCT-ND
S3: "DIP Switch, 2 Position, SPST SMD", Contact Current DC Max=25, Manufacturer="OMRON ELECTRONIC COMPONENTS", Manufacturer Part Number=A6SN-2101, Supplier Part Number 1=2029424, Contact Configuration=SPST, External Length / Height=7, No. of Switch Positions=2, PackageReference=DIP-4, Pitch Spacing=2.54, Storage Location="PCB Assembly WS", Supplier="ECE Dept", Supplier 1=Farnell
T1: library part TM_BSH105, "MOSFET N-CH 20V 1.05A SOT-23", Current - Continuous Drain (Id) @ 25° C=1.05A, Drain to Source Voltage (Vdss)=20V, Input Capacitance (Ciss) @ Vds="152pF @ 16V", Manufacturer="NXP Semiconductors", Package / Case="TO-236-3, SC-59, SOT-23-3", Power - Max=417mW, Supplier Part Number 1=1758066, FET Type="MOSFET N-Channel, Metal Oxide", Gate Charge (Qg) @ Vgs="3.9nC @ 4.5V", Manufacturer Part Number=BSH105,215, Pricing="1=0.53, 10=0.42, 25=0.3544, 100=0.2885, 250=0.23896, 500=0.1974, 1000=0.14785 (NZD)", Rds On (Max) @ Id, Vgs="200 mOhm @ 600mA, 4.5V", Storage Location="PCB Assembly WS", Supplier="ECE Dept", Supplier 1=Farnell, Supplier 2=Digi-Key, Supplier Part Number 2=568-6215-1-ND
TP1 TP2 TP3 TP4 TP5 TP6 TP7 TP8 TP9 TP10 TP11 TP13 TP14 TP15 TP16 TP17 TP18 TP19 TP21 TP22 TP23 TP24 TP25 TP28: library part TP_1206, "Test-Point 3.3x1.6x2.1mm SMD", Manufacturer="Harwin Inc", Manufacturer Part Number=S1751-46R, Supplier Part Number 1=952-1478-2-ND, Mounting Type="Surface Mount", Storage Location=ProtoPlace, Supplier="ECE Dept", Supplier 1=Digi-Key, Supplier 2=Farnell, Supplier Part Number 2=1826282, Type="PC Test Point"
U1: library part SE_ATSAM4S16BA-MU, "IC MCU 32BIT 512KB FLASH 64LQFP", Manufacturer=Atmel, Package / Case=64-LQFP, Supplier Part Number 1=ATSAM4S8BA-ANRCT-ND, Voltage - Supply (Vcc/Vdd)="1.62 V ~ 3.6 V", Code_JEDEC=MO-220VMMD-3, ComponentLink1Description="Manufacturer URL", ComponentLink1URL=http://www.atmel.com/, ComponentLink2Description="SAM4S Series Datasheet", ComponentLink2URL=http://www.atmel.com/dyn/resources/prod_documents/11100.pdf, ComponentLink3Description="SAM4S Series Summary", ComponentLink3URL=http://www.atmel.com/dyn/resources/prod_documents/11100S.pdf, Connectivity="I²C, IrDA, Memory Card, SPI, SSC, UART/USART, USB", Core Processor="ARM® Cortex®-M4", Core Size=32-Bit, Data Converters="A/D 11x12b, D/A 2x12b", Manufacturer Part Number=ATSAM4S8BA-ANR, Number of I/O=47, PackageDescription="64-Pin Quad Flat No-Lead (QFN) Sawn, 9 x 9 x 1.0 mm Body, 0.5 mm Pitch, Exposed Pad", PackageReference=64PS, PackageVersion="revJ, Jul-2007", Packaging="Cut Tape (CT)", Peripherals="Brown-out Detect/Reset, DMA, POR, PWM, WDT", Program Memory Size="512KB (512K x 8)", Program Memory Type=FLASH, RAM Size="128K x 8", Speed=120MHz, Supplier 1=Digi-Key
U2 U4: library part SV_CAT6219-330TDGT3, "IC REG LIN 3.3V 500MA TSOT23-5", Base Part Number=CAT6219, Current - Output=500mA, Package / Case="SOT-23-5 Thin, TSOT-23-5", Supplier Device Package=TSOT-23-5, Supplier Part Number=CAT6219-330TDGT3CT-ND, Voltage - Input (Max)=5.5V, Voltage - Output (Min/Fixed)=3.3V, Voltage Dropout (Max)="0.5V @ 500mA", ComponentLink1Description=http://www.onsemi.com/pub/Collateral/CAT6219-D.PDF, ComponentLink1URL=http://www.onsemi.com/pub/Collateral/CAT6219-D.PDF, ComponentLink2Description="CAT6219 Datasheet", ComponentLink2URL=\\maxwell\elecapp\AltiumDesigner\Libraries\DatasheetsNew\ENCE461\CAT6219-D.PDF, Manufacturer Part Number=CAT6219-330TDGT3, Supplier=Digi-Key, Supplier 1=Digi-Key
U3: library part ADP2302ARDZ-5.0-R7, "IC REG BUCK 5V 2A 8SOIC", Current - Output=2A, Frequency - Switching=700kHz, Supplier Part Number 1=ADP2302ARDZ-5.0-R7CT-ND, Voltage - Input (Max)=20V, Voltage - Output (Min/Fixed)=5V, ComponentLink1Description="ADP2302ARDZ-5.0 Datasheet", ComponentLink1URL=\\maxwell\elecapp\AltiumDesigner\Libraries\DatasheetsNew\ENCE461\ADP2302_2303.pdf, Manufacturer_Part_Number=ADP2302ARDZ-5.0-R7, Output Type=Fixed, Supplier 1=Digi-Key, Type=DEV, Vendor="Analog Devices Inc"
U5: library part NRF24, "nRF24 SMD Module", Warning="No power planes near or under device"
U6: "1.8V - 5V level converter"
U7: "Accelerometer 3-Axis, +/-2 g / +/-4 g / +/-8 g / +/-16 g with Digital Output, 1.6 KHz BW, Industrial, 14-pin LGA, Tray", Manufacturer="Analog Devices", Supply Current="140 uA", Voltage Supply (V)="2.0 to 3.6", # of Axes=3, -3dB Bandwidth="1.6 KHz", ComponentLink1Description="Manufacturer URL", ComponentLink1URL=http://www.analog.com/en/index.html, ComponentLink2Description=Datasheet, ComponentLink2URL=http://www.analog.com/static/imported-files/data_sheets/ADXL345.pdf, ComponentLink3Description="Package Specification", ComponentLink3URL=http://www.analog.com/static/imported-files/data_sheets/ADXL343.pdf, ComponentLink4Description="Product URL", ComponentLink4URL=http://www.analog.com/en/mems-sensors/mems-inertial-sensors/adxl345/products/product.html, DatasheetVersion="Rev. D", Manufacturer 1="Analog Devices", Manufacturer Part Number 1=ADXL345BCCZ, Mounting Technology="Surface Mount", Output Type=Digital, PackageDescription="14-Pin Land Grid Array, 3 x 5 mm Body, 0.8 mm Pitch", PackageReference=CC-14-1, PackageVersion="03-16-2010-A, 03/2010", Packing=Tray, PartNumber=ADXL345BCCZ, Sensitivity="256/128/64/32 LSB/g"
Y1: library part XT_CRYSTAL_12MHz_18pF, "CRYSTAL 12MHZ 18PF 6X3.5mm SMD", ESR (Equivalent Series Resistance)="60 Ohm", Frequency Stability=±50ppm, Frequency Tolerance=±30ppm, Load Capacitance=18pF, Manufacturer="CTS-Frequency Controls", Manufacturer Part Number=406C35D12M00000, Operating Mode=Fundamental, Operating Temperature="-20°C ~ 70°C", Package / Case="4-SMD, No Lead (DFN, LCC)", Supplier Part Number 1=CTX855CT-ND, Frequency=12MHz, Height="0.047\" (1.20mm)", Mounting Type="Surface Mount", Size / Dimension="0.236\" L x 0.138\" W (6.00mm x 3.50mm)", Supplier 1=Digi-Key

## Via types
v1: diameter 1, hole 0.5, Top Layer to Bottom Layer, 57 vias
v2: diameter 1.27, hole 0.711, Top Layer to Bottom Layer, 30 vias
v3: diameter 0.8, hole 0.3, Top Layer to Bottom Layer, 2 vias
v4: diameter 2, hole 1, Top Layer to Bottom Layer, 2 vias
v5: diameter 1, hole 0.5, Top Layer to Bottom Layer, tented top, 1 vias
v6: diameter 2, hole 1.5, Top Layer to Bottom Layer, 1 vias

## Nets (pads, with @x,y where several pads share a name; then routed paths per layer and width w, separated by ;. In a path a pad name is that pad's centre, name@x,y a point inside that pad or via, vN(x,y) a via of type N, cw(c..) or ccw(c..) an arc to the next point about the centre after c; other vN are vias at no path point)
3V3: C5.2 C7.2 C9.2 C11.2 C13.2 C24.2 C26.2 DL1.2 DL2.2 DL3.2 H2.7 H2.8 L4.2 P1.2 P2.2 P4.1 R11.2 R17.2 R18.2 TP1.1 U1.1 U1.7 U1.18 U1.45 U1.58 U6.1 U6.5 U7.1 U7.7 | length 77.9
  Top Layer w0.3: U6.5 5.128,15.993 5.128,16.812 5.334,17.018 5.588,17.018 5.903,17.333 U6.1 6.415,18.73 C24.2 6.415,25.081 P2.2 ; R11.2 R11.2@20.949,39.872 ; v1@20.949,38.614 v1(20.955,38.608) ; R11.2@21.07,39.878 21.146,39.954 DL3.2 ; v1(23.495,64.008) 23.526,64.039 24.988,64.039 25.019,64.07 25.019,63.42 25.189,63.25 U1.18 ; U1.7 32.775,65.55 C5.2@32.775,68.125 ; C5.2 C5.2@32.775,68.125 ; v1(33.655,67.437) 33.513,67.437 32.825,68.125 C5.2@32.775,68.125 ; U1.45 34.25,53.45 C9.2@35.499,52.201 ; v1(34.544,52.578) 34.733,52.578 34.987,52.324 C9.2 ; v2(35.306,44.069) 35.312,44.063 35.312,41.408 R17.2 ; U1.1@35.775,66.15 36.518,66.893 36.518,67.01 36.818,67.31 36.83,67.31 36.799,67.341 36.799,68.422 v1(36.83,68.453) ; U1.58 37.55,60.775 41.533,60.775 C11.2 41.591,60.783 42.204,60.17 42.204,59.954 v3(42.3,59.858) ; v1(39.751,33.401) 41.252,31.9 41.85,31.9 41.851,31.899 C26.2@41.851,31.301 ; R18.2 41.136,41.502 41.802,42.168 41.802,42.945 v2(41.91,43.053) ; U7.1 42.1,33.925 C26.2 L4.2 ; DL1.2 43.124,46.674 43.124,45.014 v1(43.18,44.958) ; DL2.2 44.768,45.575 45.212,45.131 v1(45.212,44.958) ; U7.7 47.106,35.75 47.222,35.865 47.222,36.554 v1(47.752,37.084) ; TP1.1 v5(53.467,48.387)
  Top Layer w0.5: P2.2 P1.2 7.493,32.639 19.812,32.639 v2(20.447,33.274) ; R11.2 20.943,40.755 v1(21.717,41.529) ; v1@20.949,38.614 R11.2@20.949,39.872
3V3_RADIO: DL4.2 L3.2 R14.2 | length 11.8
  Top Layer w0.3: R14.2 R14.2@4.025,50.495
  Top Layer w0.5: L3.2 2.794,51.55 R14.2 ; R14.2@4.025,50.495 DL4.2
5V: C1.1 C17.1 C25.2 H4.1 P1.1 P2.1 P5.2 TP11.1 U2.1 U2.3 U4.1 U6.6 | length 15.5
  Top Layer w0.3: U4.1 4.154,37.332 C17.1 4.154,34.432 v1(4.254,34.332) ; U6.6 5.911,15.81 C25.2 v1(10.603,15.81) ; v1(14.351,37.084) 15.92,37.084 U2.1 ; U2.3 17.928,35.592 C1.1 18.195,35.258 18.195,34.07 v1(18.161,34.036) ; v1(28.581,3.556) TP11.1
5V_BUCK: P5.1 R10.2 | length 14.7
  Top Layer w1: R10.2 49.53,20.828 P5.1
ACC_INT1: U1.42 U7.8 | length 25
  Top Layer w0.3: U1.42 32.75,52.463 33.696,51.517 33.696,50.831 v2(33.881,50.645) ; U7.8 47.244,38.719 v2(47.244,39.878)
  Bottom Layer w0.3: v2(33.881,50.645) 39.188,45.339 41.597,45.339 47.058,39.878 v2(47.244,39.878)
ACC_INT2: U1.41 U7.9 | length 23.7
  Top Layer w0.3: U1.41 32.25,52.256 32.258,52.248 v2(32.258,51.308) ; v2(44.958,40.386) 44.958,40.124 45.2,39.882 U7.9
  Bottom Layer w0.3: v2(32.258,51.308) 32.444,51.122 32.444,50.716 32.512,50.647 32.512,50.622 42.66,40.474 43.541,40.474 43.629,40.386 v2(44.958,40.386)
D_N: H1.2 R4.1 TP4.1 | length 14.9
  Top Layer w0.381: R4.1 47.74,58.647 48.021,58.928 49.782,58.928 51.115,60.262 51.542,60.262 51.766,60.038 51.766,59.611 52.575,58.801 TP4.1 53.851,58.801 54.66,59.611 54.66,60.038 54.884,60.262 55.659,60.262 57.763,62.365 59.268,62.365 H1.2
D_P: H1.3 R3.1 TP3.1 | length 14.9
  Top Layer w0.381: R3.1 47.74,59.844 48.021,59.563 49.519,59.563 50.852,60.897 51.542,60.897 51.766,61.12 51.766,61.547 52.575,62.357 TP3.1 53.851,62.357 54.66,61.547 54.66,61.12 54.884,60.897 55.396,60.897 57.5,63 59.268,63 H1.3
EXTRA_1: R19.1 U1.19 | length 17.6
  Top Layer w0.3: U1.19 26.682,62.75 26.707,62.775 27.51,62.775 27.686,62.951 27.686,63.861 26.975,64.572 26.975,66.141 26.098,67.018 26.098,76.498 R19.1
EXTRA_2: R20.1 U1.20 | length 19.3
  Top Layer w0.3: U1.20 27.833,62.25 28.186,62.603 28.186,64.068 27.6,64.654 27.6,66.223 26.598,67.225 26.598,74.598 R20.1
GND: C1.2 C2.1 C3.1 C4.1 C5.1 C6.2 C7.1 C8.2 C9.1 C10.2 C11.1 C12.2 C13.1 C15.1 C16.2 C17.2 C19.1 C20.1 C21.1 C22.1 C23.1 C24.1 C25.1 C26.1 C27.1 D3.1 H1.5 H1.6 H2.5 H2.6 H3.1 H3.3 H4.3 H5.1 H5.2 P1.3 P2.3 P3.6 Q1.1 R2.1 R5.1 R13.1 R15.1 R16.1 R27.2 R28.1 S1.1 S2.1 S3.1 S3.2 T1.2 U1.2 U1.17 U1.46 U1.60 U2.2 U3.6 U3.7 U3.EPAD U4.2 U5.2 U6.2 U7.2 U7.4 U7.5 U7.12 | length 116
  Top Layer w0.3: v1(3.491,22.479) C24.1 5.015,18.28 U6.2 ; U5.2 4.014,64.186 4.319,63.881 4.319,63.831 5.461,62.689 v1(5.461,62.611) ; U4.2 5.204,37.232 5.204,36.862 5.554,36.512 C17.2 5.708,35.578 5.708,34.424 v1(5.842,34.29) ; v1(5.334,52.705) 5.334,54.112 S3.2 ; S3.1 5.461,56.779 v1(5.461,58.293) ; C22.1 v1(7.754,41.832) ; v2(6.35,43.942) R16.1 ; C25.1 v1(10.606,17.21) ; R28.1 8.763,35.823 v2(8.763,34.359) ; v1(16.51,34.163) 16.51,34.344 16.828,34.662 16.828,37.042 U2.2 ; v2(20.828,15.748) D3.1 ; v1(20.828,35.179) 20.885,35.122 22.04,35.122 R15.1@22.098,35.064 ; v1(21.844,60.325) C10.2 ; C21.1 v2(26.251,22.822) ; C7.1@25.019,65.47 v1(25.019,67.31) 26.475,65.854 U1.17 ; v2(27.686,15.494) C19.1 ; C8.2 v1(28.448,71.12) ; v1(28.956,38.608) 29.09,38.742 29.584,38.742 30.72,39.878 S1.1 ; v1(28.956,45.085) 29.049,45.178 29.706,45.178 30.756,46.228 S2.1 ; v2(29.972,15.494) C20.1 ; C6.2 31.165,69.534 31.415,69.784 31.415,70.531 v1(31.496,70.612) ; C5.1 32.797,69.565 33.751,69.565 v1(33.782,69.596) ; R13.1 v1(34.544,30.988) ; U1.46 v1(34.75,56.182) 34.846,56.182 v1@35.052,56.388 ; U1.2 35.25,66.56 35.3,66.61 35.368,66.61 C13.1 35.362,67.317 35.362,68.447 v1(35.355,68.453) ; v1(35.336,60.804) 35.336,60.865 36.221,61.75 U1.60 ; Q1.1 Q1.1@36.543,15.765 ; v2@36.543,18.255 v2(36.576,18.288) ; C9.1 37.149,52.197 v1(38.354,52.197) ; C15.1 38.989,70.915 39.109,71.035 39.109,71.621 v1(39.243,71.755) ; U7.2 42.8,32.57 42.894,32.476 43.324,32.476 43.5,32.3 C26.1 43.523,31.623 v1(44.831,31.623) v1@44.831,31.812 ; C12.2 42.991,56.134 v1(44.704,56.134) ; v1(42.926,39.624) 42.8,39.498 U7.12 42.848,37.427 42.848,36.418 43.341,35.925 44.085,35.925 44.352,35.658 44.352,34.121 44.448,34.025 U7.5 45.2,32.181 v1@44.831,31.812 ; C11.1 43.118,60.96 v3(44.323,60.96) ; U7.4 44.4,32.253 44.471,32.182 44.471,32.173 v1@44.831,31.812 ; v1(44.45,75.057) 44.45,76.2 R27.2 ; R5.1@45.292,70.612 46.228,70.612 v1(46.863,69.977) ; v1(46.736,74.676) 46.736,75.786 T1.2 ; C4.1 47.974,63.5 48.693,64.219 v1(48.811,64.219) ; C3.1 v1(49.276,67.818) ; C27.1 49.53,31.496 v2(50.165,30.861) ; v2(56.515,70.866) 56.515,69.889 R2.1 ; H1.5 H1.6@59.276,65.508 ; H1.6@61.976,59.508 H1.6@61.976,62.008 ; H1.6@61.976,64.008 H1.6@61.976,66.508
  Top Layer w0.5: v2(13.462,41.783) C2.1
  Top Layer w1: U3.7 17.324,25.5 ; U3.6 17.324,25.5 ; v6(19,25.5) 17.324,25.5 ; Q1.1@36.543,15.765 v2@36.543,18.255 ; C16.2 46.485,16.037 46.485,16.018 46.482,16.015 H3.1
LED_DATA: TP21.1 U1.35 U6.3 | length 55.7
  Top Layer w0.3: v1(3.429,19.812) 4.003,19.238 U6.3 ; TP21.1 10.414,21.463 v1(13.208,21.463) ; v1(27.813,52.578) 27.897,52.662 28.472,52.662 29.25,53.44 U1.35
  Bottom Layer w0.3: v1(3.429,19.812) 3.49,19.751 12.761,19.751 13.208,20.198 v1@13.208,21.082 ; v1(13.208,21.463) 13.208,37.973 v1(27.813,52.578)
MISO: TP18.1 U1.27 U5.7 | length 21.2
  Top Layer w0.3: U5.7 10.371,64.432 11.43,63.373 14.605,63.373 TP18.1 18.267,60.727 19.918,60.727 21.895,58.75 U1.27
MOSI: TP17.1 U1.22 U5.6 | length 23.1
  Top Layer w0.3: U5.6 9.1,68.404 9.276,68.58 12.446,68.58 13.843,67.183 16.764,67.183 18.042,65.905 18.042,64.635 TP17.1 ; TP17.1@19.042,65.159 22.951,61.25 U1.22
NetC2_2: C2.2 R11.1 TP13.1 U2.4 U2.5 | length 11.5
  Top Layer w0.3: C2.2 TP13.1@20.193,44.92 ; U2.4 U2.4@17.942,39.878 ; R11.1 R11.1@19.57,39.878 ; TP13.1@20.701,44.704 21.629,44.704 TP13.1@21.811,44.522
  Top Layer w0.5: C2.2 17.056,40.92 U2.5 U2.4 ; U2.4@17.942,39.878 R11.1
NetC3_2: C3.2 U1.62 Y1.3 | length 13.3
  Top Layer w0.3: U1.62 37.55,62.775 38.645,62.775 39.138,63.268 39.138,65.3 40.346,66.508 40.346,67.113 Y1.3@40.584,67.35 ; Y1.3 Y1.3@40.584,67.35 ; C3.2 45.509,67.799 44.723,67.799 44.125,68.397 41.887,68.397 Y1.3@41.222,67.732 ; Y1.3@40.584,67.35 40.84,67.35 Y1.3@41.222,67.732 ; Y1.3@40.584,67.35 40.965,67.732 Y1.3@41.222,67.732
NetC4_2: C4.2 U1.61 Y1.1 | length 9.7
  Top Layer w0.3: U1.61 39.009,62.25 39.638,62.879 39.638,63.832 39.814,64.008 41.671,64.008 41.887,63.792 41.887,63.605 42.16,63.332 43.11,63.332 45.36,63.332 C4.2
NetC6_1: C6.1 C8.1 C10.1 C12.1 L1.2 TP8.1 U1.8 U1.12 U1.24 U1.54 | length 46.8
  Top Layer w0.3: C10.1 24.972,60.325 ; 25.047,60.25 U1.24 27.865,60.25 ; C8.1 28.695,68.134 29.464,67.365 ; C6.1 31.15,68.134 31.4,67.884 31.4,67.201 31.576,67.025 32.004,67.025 32.225,66.804 32.225,66.2 32.25,66.175 U1.8 32.25,64.49 31.514,63.754 30.986,63.754 30.25,64.49 ; L1.2@34.949,73.406 34.91,73.445 30.885,73.445 30.885,73.021 30.674,72.81 30.674,72.457 29.464,71.247 29.464,67.365 ; C12.1 41.244,56.227 41.244,56.927 39.421,58.75 U1.54 32.968,58.75 31.468,60.25 27.865,60.25 ; 27.865,60.25 30.314,62.699 30.314,64.426 30.25,64.49 ; 29.464,67.365 30.25,66.579 U1.12 30.25,64.49
NetC14_1: C14.1 R5.2 | length 1.9
  Top Layer w0.3: C14.1@40.724,70.358 R5.2@42.592,70.358
NetC14_2: C14.2 C15.2 L1.1 U1.64 | length 11.6
  Top Layer w0.3: L1.1@37.822,73.406 L1.1@38.1,73.128 ; L1.1 37.949,69.905 C15.2 39.02,68.896 C14.2 ; U1.64@38.15,63.775 38.574,64.199 38.574,68.038 C15.2@39.116,68.58
NetC16_1: C16.1 F1.1 H3.2 TP9.1 | length 18.5
  Top Layer w0.3: TP9.1 35.814,8.964 F1.1
  Top Layer w1: F1.1 39.116,9.144 H3.2 43.942,16.548 C16.1
NetC18_1: C18.1 D3.2 L2.1 U3.8 | length 18.6
  Top Layer w1: U3.8 16.689,22.743 C18.1 18.35,19.62 16.764,18.034 16.764,6.378 L2.1
NetC18_2: C18.2 U3.1 | length 3.2
  Top Layer w1: C18.2 19.75,22.034 U3.1
NetC19_2: C19.2 C20.2 L2.2 R10.1 U3.5 | length 46
  Top Layer w0.2: v1(14.759,27.405) U3.5
  Top Layer w0.3: v1(25.32,20.654) C19.2
  Top Layer w1: L2.2 25.936,18.904 C19.2 C20.2 v4(32.178,20.654) ; v4(37.004,20.654) 39.97,20.654 R10.1
  Bottom Layer w0.3: v1(14.759,27.405) 14.759,26.135 20.24,20.654 v1(25.32,20.654)
  Bottom Layer w1: v4(32.178,20.654) v4(37.004,20.654)
NetC22_2: C22.2 R14.1 TP15.1 U4.4 U4.5 | length 11
  Top Layer w0.3: C22.2@3.683,42.303 C22.2 C22.2@4.104,41.782 ; TP15.1 TP15.1@3.937,46.482 ; U4.5 U4.4
  Top Layer w0.5: C22.2@3.683,42.303 TP15.1 ; TP15.1@3.937,46.482 R14.1 ; U4.5 C22.2@4.104,41.782
NetC23_2: C23.2 L3.1 U5.1 | length 4.5
  Top Layer w0.3: U5.1 U5.1@2.8,66.743 ; L3.1 L3.1@2.8,62.339
  Top Layer w0.5: L3.1@2.8,62.339 C23.2 U5.1@2.8,66.743
NetC27_2: C27.2 L4.1 U7.6 | length 6.1
  Top Layer w0.3: L4.1 47.179,31.379 C27.2 47.179,32.846 U7.6
NetDL1_1: DL1.1 R6.1 | length 2.1
  Top Layer w0.3: R6.1 42.672,48.726 DL1.1
NetDL2_1: DL2.1 R7.1 | length 2.1
  Top Layer w0.3: R7.1 44.45,48.648 DL2.1
NetDL3_1: DL3.1 R15.2 | length 1.8
  Top Layer w0.3: R15.2 DL3.1
NetDL4_1: DL4.1 R16.2 | length 1.7
  Top Layer w0.3: R16.2 DL4.1
NetF1_2: F1.2 Q1.3 R8.1 | length 8.6
  Top Layer w1: R8.1 33.039,13.709 34.987,13.709 35.01,13.732 Q1.3 ; F1.2 33.244,9.294 33.244,9.892 35.56,12.208 Q1.3@35.56,13.427
NetH4_2: H4.2 TP22.1 U6.4 | length 13.2
  Top Layer w0.3: U6.4 4.064,15.757 TP22.1 9.398,7.366 H4.2@9.398,4.826
NetP3_1: P3.1 R19.2 | length 2.5
  Top Layer w0.3: P3.1@27.48,82 27.48,79.62 R19.2
NetP3_2: P3.2 R20.2 | length 2.5
  Top Layer w0.3: R20.2 30,81.98 P3.2@30.02,82
NetP3_3: P3.3 R21.2 | length 2.5
  Top Layer w0.3: R21.2 32.5,81.94 P3.3@32.56,82
NetP3_4: P3.4 R22.2 | length 2.5
  Top Layer w0.3: R22.2 35,81.9 P3.4@35.1,82
NetP3_5: P3.5 R23.2 | length 2.6
  Top Layer w0.3: R23.2 37.64,79.64 P3.5@37.64,82
NetP4_2: P4.2 T1.3 | length 9.8
  Top Layer w0.3: T1.3 53.5,76.8 P4.2
NetR3_2: R3.2 U1.57 | length 9.6
  Top Layer w0.3: U1.57 38.15,60.25 40.478,60.25 41.62,59.108 45.504,59.108 46.24,59.844 R3.2
NetR4_2: R4.2 U1.56 | length 9.5
  Top Layer w0.3: U1.56 40.271,59.75 41.728,58.293 46.04,58.293 46.24,58.493 R4.2
NetR9_2: R9.2 U3.4 | length 2.6
  Top Layer w0.3: U3.4 21.326,27.42 R9.2
NetR21_1: R21.1 U1.15 | length 16.4
  Top Layer w0.3: U1.15 28.725,65.55 28.725,66.525 28.373,66.877 27.653,66.877 27.098,67.432 27.098,73.525 31.573,78 R21.1
NetR22_1: R22.1 U1.14 | length 18.2
  Top Layer w0.3: U1.14 29.25,66.707 28.58,67.377 27.86,67.377 27.598,67.639 27.598,73.268 31.546,77.216 34.216,77.216 R22.1
NetR23_1: R23.1 U1.11 | length 19.2
  Top Layer w0.3: U1.11 30.75,66.786 30.099,67.437 30.099,71.175 30.425,71.501 36.195,71.501 36.449,71.755 36.449,75.565 37.5,76.616 R23.1
NetR24_1: R24.1 S1.2 | length 3.5
  Top Layer w0.3: S1.2 27.698,38.85 R24.1
NetR25_1: R25.1 S2.2 | length 4.2
  Top Layer w0.3: S2.2 26.936,46.458 R25.1
NetR26_1: R26.1 S3.4 | length 2.6
  Top Layer w0.3: S3.4 15.621,55.499 R26.1
NetR29_1: R29.1 S3.3 | length 2.1
  Top Layer w0.3: S3.3 16.268,54.229 R29.1
NetTP2_1: TP2.1 U1.55 | length 17.2
  Top Layer w0.3: U1.55 40.064,59.25 41.656,57.658 48.146,57.658 51.816,53.988 TP2.1@51.816,53.213
nRST: H2.1 R24.2 TP5.1 U1.39 | length 50.9
  Top Layer w0.3: R24.2 v2(31.242,36.83) ; v2(31.242,52.578) 31.246,52.582 31.246,54.471 U1.39 ; v2(47.752,34.29) 48.014,34.29 48.395,34.671 TP5.1@50.177,34.671 ; TP5.1 54.483,34.671 H2.1
  Bottom Layer w0.3: v2(31.242,52.578) v2(31.242,36.83) 31.242,35.433 32.385,34.29 v2(47.752,34.29)
PIEZO: R27.1 T1.1 TP23.1 U1.4 | length 26.8
  Top Layer w0.3: U1.4 34.25,66.83 34.505,67.085 34.505,69.104 36.957,71.556 36.957,75.311 39.396,77.75 R27.1 T1.1 46.8,80.328 TP23.1@48.514,82.042
RADIO_CE: U1.32 U5.3 | length 27.4
  Top Layer w0.3: U5.3 5.286,64.564 10.922,58.928 16.442,58.928 19.736,55.634 24.845,55.634 25.44,56.229 25.44,56.25 U1.32
RADIO_CSN: U1.31 U5.4 | length 24.9
  Top Layer w0.3: U5.4 6.857,66.5 6.857,65.152 10.361,61.648 15.568,61.648 20.466,56.75 U1.31
RADIO_EN: R28.2 TP28.1 U1.30 U4.3 | length 39.3
  Top Layer w0.3: U4.3 8.934,37.382 11.158,39.606 11.158,41.13 v2(11.176,41.148) TP28.1@11.176,44.323 ; v2(21.336,57.785) 24.892,57.785 25.427,57.25 U1.30
  Bottom Layer w0.3: v2@11.176,41.402 11.176,51.943 17.018,57.785 v2(21.336,57.785)
RADIO_IRQ: TP19.1 U1.34 U5.8 | length 32.5
  Top Layer w0.3: U5.8 11.943,66.5 11.943,65.209 12.319,64.832 v1(12.319,64.643) ; TP19.1 22.721,50.673 25.527,53.479 25.527,55.114 v1(25.529,55.116) ; v1@25.527,55.118 25.624,55.118 26.256,55.75 28.549,55.75 28.725,55.574 28.725,54.5 U1.34
  Bottom Layer w0.3: v1(12.319,64.643) 16.002,64.643 v1(25.529,55.116)
RADIOCONFIG_0: R26.2 U1.28 | length 16.8
  Top Layer w0.3: R26.2 18.669,55.499 v1(19.304,54.864) ; U1.28 27.51,58.25 27.934,58.674 v1(28.956,58.674)